# Altium PCB PCB1.PcbDoc
Units mm, origin at the board's own origin, x right, y up, seen from the top; angles counter-clockwise.
Board outline 37.85 x 26.67 mm, 2 copper layers (Top Layer, Bottom Layer); 17 components, 12 nets, 71 pads, 14 vias.
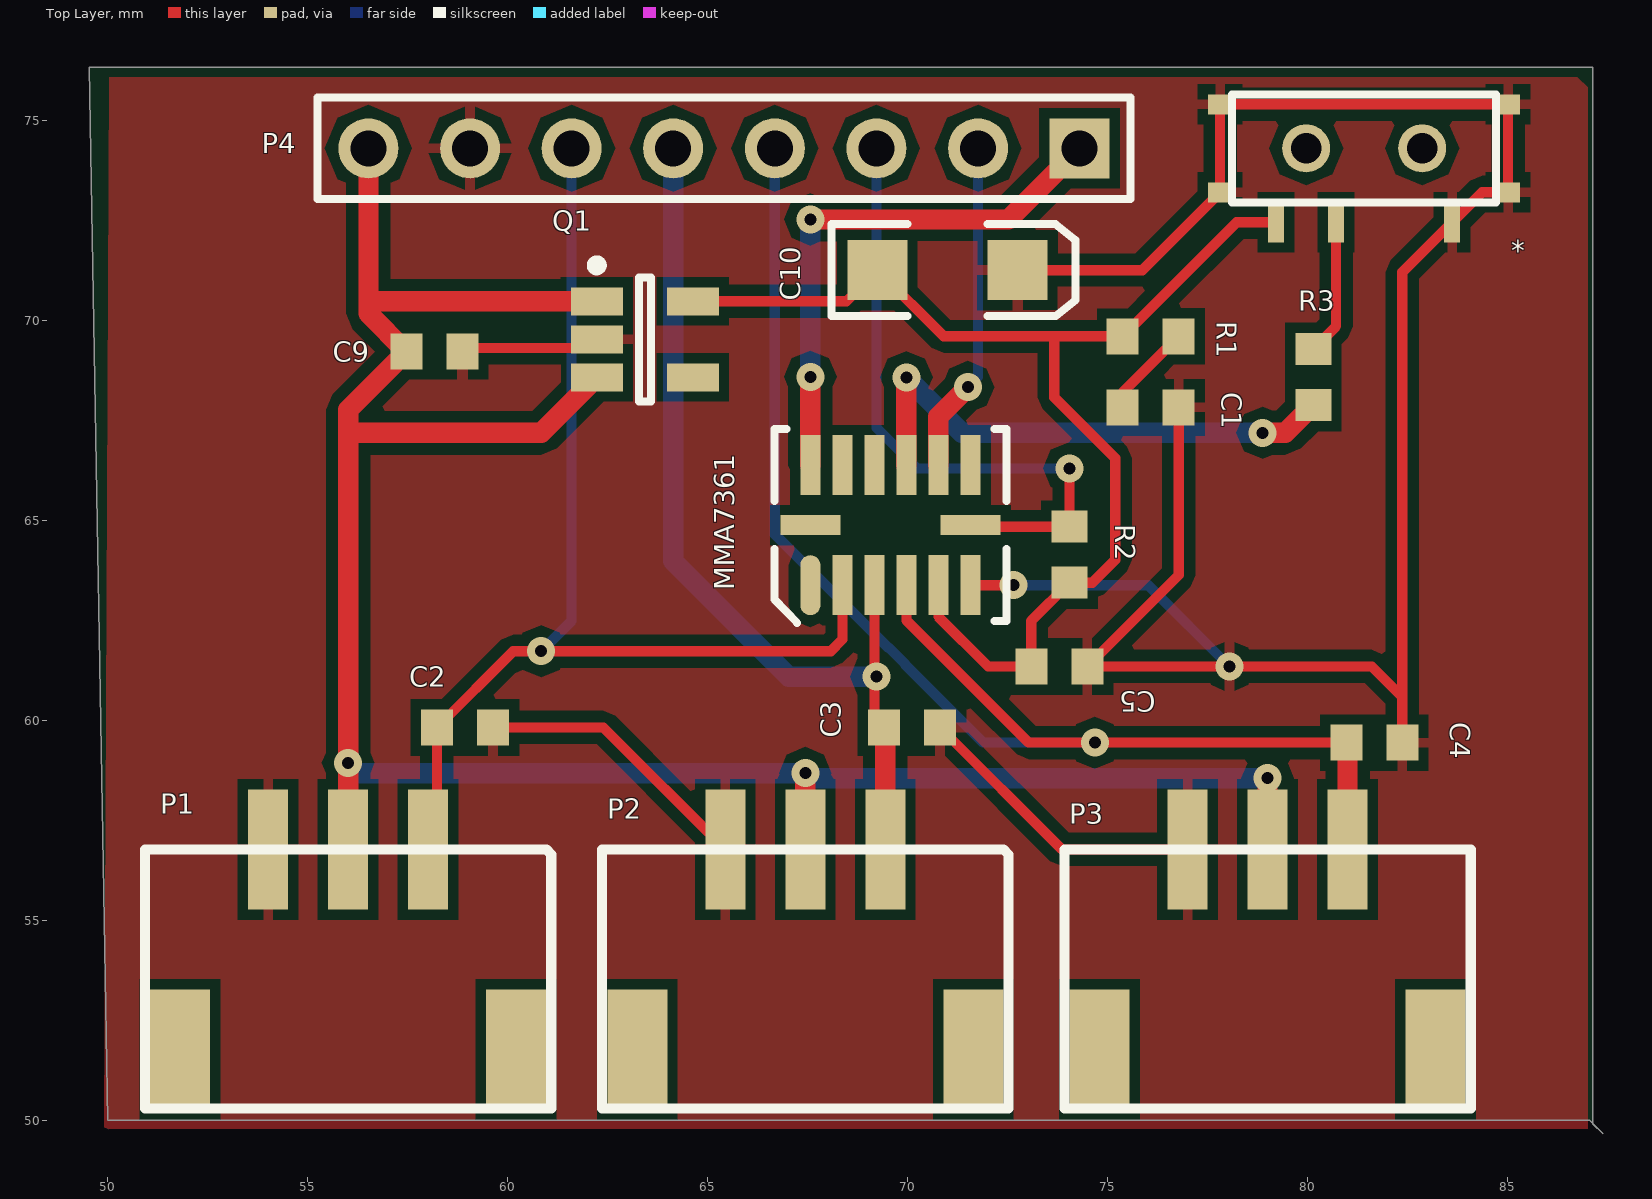
[diagram p0: Top Layer view]
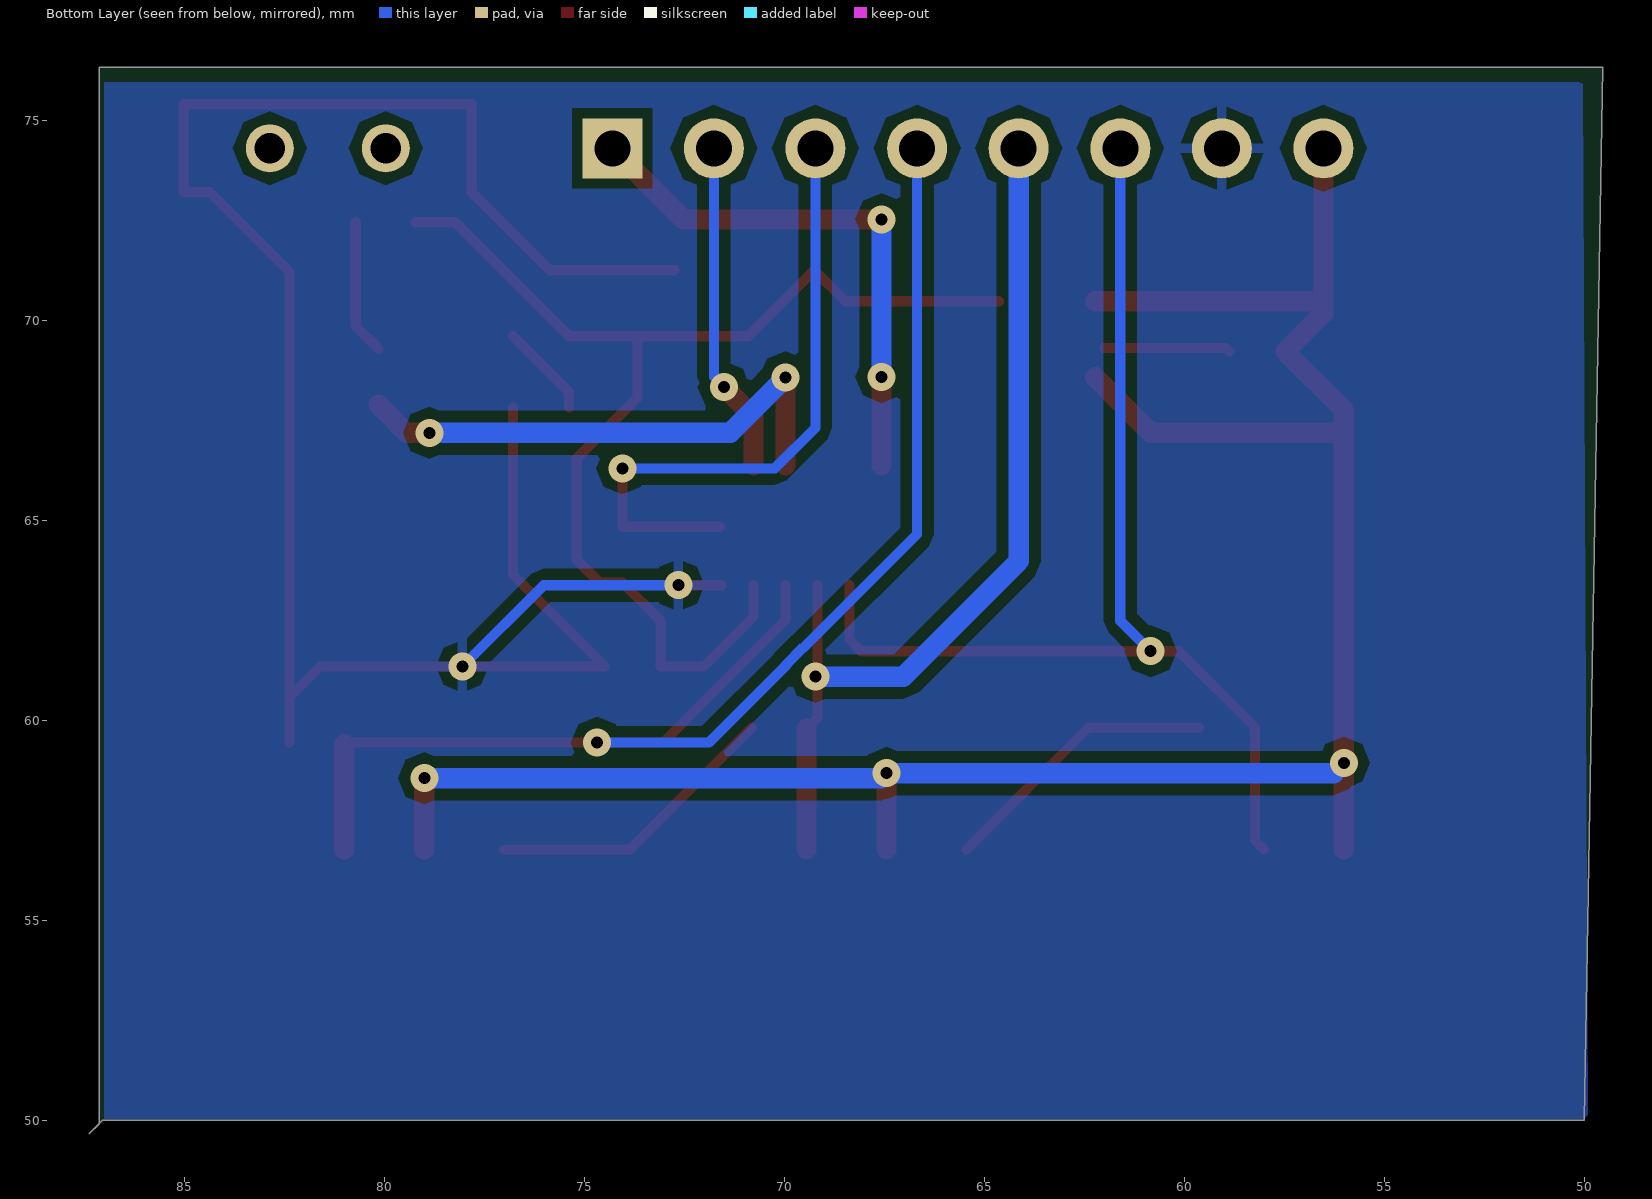
[diagram p1: Bottom Layer view, seen from below]

## Layer stack, top to bottom
Top Layer: signal copper 0.0356
Dielectric: dielectric 0.32, FR-4, Dk 4.8
Bottom Layer: signal copper 0.0356

## Board outline
49.53,76.327 87.122,76.327 87.122,49.911 87.376,49.657 87.033,50 50,50

## Design rules (kind name [scope] priority, off if disabled: settings)
Clearance [All] p1: gap=0.254
PolygonConnect [All] p1: connectstyle=Relief reliefconductorwidth=0.254 reliefentries=4 polygonreliefangle="90 Angle"
RoutingVias [All] p1: holewidth=0.711 width=1.27 viastyle="Through Hole" minholewidth=0.711 minwidth=1.27 maxholewidth=0.711 maxwidth=1.27
SilkscreenOverComponentPads [All] p1: minsilkscreentomaskgap=0.254
SolderMaskExpansion [All] p1: expansion=0.102
Width [All] p1: maxlimit=1.27 minlimit=0.254 preferedwidth=0.254
27 further rules are at their usual default settings.

## Classes and differential pairs
component class Sheet1: C1 C2 C3 C4 C5 C9 C10 P1 P2 P3 P4 Q1 R1 R2 R3

## Components (designator, comment, footprint, x,y, rotation, side; value= is the part's Value field where it differs from the comment)
* "Component_1" kaiguan 81.407,74.295 r0 top
C1 "Cap" 1608[0603] 76.073,67.818 r0 top
C2 "3.3n" 1608[0603] 58.928,59.817 r180 top
C3 "3.3n" 1608[0603] 70.104,59.817 r180 top
C4 "3.3n" 1608[0603] 81.661,59.436 r180 top
C5 "0.1u" 1608[0603] 73.787,61.341 r0 top
C9 "4.7u" 1608[0603] 58.166,69.215 r0 top
C10 "10u" 3.2X1.6X1.1 70.993,71.247 r0 top
MMA7361 "Component_1" MMA7361 67.564,63.373 r90 top (schematic designator *)
P1 "Header 3" sh-2.0 56.007,56.769 r0 top
P2 "Header 3" sh-2.0 67.437,56.769 r0 top
P3 "Header 3" sh-2.0 78.994,56.769 r0 top
P4 "Header 8" HDR1X8 74.295,74.295 r180 top
Q1 "3.3V  LDO" SOT235 62.23,71.374 r0 top (schematic designator *)
R1 "Res1" 1608[0603] 76.073,69.596 r0 top
R2 "Res2" 1608[0603] 74.041,64.135 r90 top
R3 "Res2" 1608[0603] 80.137,68.58 r270 top

## Footprints (in the part's own frame and the unit in brackets; to place one, negate y for a bottom-side part, rotate by r counter-clockwise, add the part's x,y. Pads: shape width x height; smd on the part's side, far side on the other; paste and mask are expansions set on the pad)
3.2X1.6X1.1 [mm] "SMT LED; 2 Flat Leads"
  rect 1.5x1.5 smd: 1(-1.75,0) 2(1.75,0)
  silkscreen extent -2.9,-1.15 3.2,1.15
1608[0603] [mm] "Chip Capacitor, Body 1.6x0.8mm, IPC High Density"
  rect 0.8x0.9 smd: 1(-0.7,0) 2(0.7,0)
  body extent -0.87,-0.48 0.87,0.48, height 1.3
HDR1X8 [mm] "Connector; Header; 8 Position"
  rect 1.5x1.5 hole 0.9: 1(0,0)
  round 1.5 hole 0.9: 2(2.54,0) 3(5.08,0) 4(7.62,0) 5(10.16,0) 6(12.7,0) 7(15.24,0) 8(17.78,0)
  silkscreen extent -1.27,-1.27 19.05,1.27
kaiguan [mm]
  round 1.2 hole 0.762: 0(-1.45,0) 1(1.45,0)
  rect 0.6x0.5 smd: 1(-3.6,1.1) 2(-3.6,-1.1) 3(3.6,1.1) 4(3.6,-1.1)
  rect 0.4x1 smd: 5(-2.2,-1.85) 6(-0.7,-1.85) 7(2.2,-1.85)
  silkscreen extent -3.3,-1.35 3.3,1.35
MMA7361 [mm]
  oval 1.5x0.5 smd: 1(0,0)
  rect 1.5x0.5 smd: 2(0,-0.8) 3(0,-1.6) 4(0,-2.4) 5(0,-3.2) 6(0,-4) 8(3,-4) 9(3,-3.2) 10(3,-2.4) 11(3,-1.6) 12(3,-0.8) 13(3,0)
  rect 0.5x1.5 smd: 7(1.5,-4) 14(1.5,0)
  silkscreen extent -0.94,-4.9 3.9,0.9
sh-2.0 [mm]
  rect 1x3 smd: 1(-2,0) 2(0,0) 3(2,0)
  rect 1.5x3 smd: GND(-4.2,-5) GND(4.2,-5)
  silkscreen extent -5.08,-6.48 5.08,0
SOT235 [mm]
  rect 1.3x0.7 smd: 1(-0.006,-0.904) 2(-0.006,-1.854) 3(-0.006,-2.804) 4(2.394,-2.804) 5(2.394,-0.904)
  silkscreen extent -0.13,-3.4 1.34,0.12, body extent 0.29,-3.4 2.09,-0.3, height 1.45

## Part data
C1: "Capacitor"
C2 C3 C4 C5 C9 C10: library part CAP-0.1UF, "SMD-CAP"
P1 P2: "Header, 3-Pin"
P4: "Header, 8-Pin"
R1: "Resistor"
R2 R3: library part Res1, "Resistor"

## Via types
v1: diameter 0.7, hole 0.3, Top Layer to Bottom Layer, 14 vias

## Nets (pads, with @x,y where several pads share a name; then routed paths per layer and width w, separated by ;. In a path a pad name is that pad's centre, name@x,y a point inside that pad or via, vN(x,y) a via of type N, cw(c..) or ccw(c..) an arc to the next point about the centre after c; other vN are vias at no path point)
0GD: MMA7361.9 P4.2 | length 8
  Top Layer w0.508: MMA7361.9 70.764,67.589 v1(71.501,68.326)
  Bottom Layer w0.254: 71.755,68.58 P4.2
G-s: *.6 R3.1 | length 3.4
  Top Layer w0.254: R3.1 80.707,69.85 *.6
GND: *.1@77.807,75.395 *.2 *.3 *.4 *.7 C1.2 C2.1 C3.1 C4.1 C5.2 C9.2 C10.2 MMA7361.6 P1.1 P2.1 P3.1 P4.7 Q1.2 | length 73.3
  Top Layer w0.254: C9.2 58.952,69.301 Q1.2@62.005,69.301 ; C2.1 62.389,59.817 P2.1 ; C3.1 73.852,56.769 P3.1 ; MMA7361.6 v1(72.644,63.373) ; C10.2 75.859,71.247 *.2 77.807,75.395 *.3 *.4 84.357,73.195 *.7 82.361,71.199 82.361,60.579 ; C1.2 76.773,63.627 C5.2 v1(78.043,61.341) 81.599,61.341 82.361,60.579 ; C4.1 82.361,60.579
  Bottom Layer w0.254: v1(72.644,63.373) 76.011,63.373 v1(78.043,61.341)
Net*_10: MMA7361.10 R3.2 | length 13.2
  Top Layer w0.508: MMA7361.10 v1(69.964,68.567) ; v1(78.867,67.183) 79.44,67.183 R3.2
  Bottom Layer w0.508: v1(69.964,68.567) 71.348,67.183 v1(78.867,67.183)
NetC1_1: C1.1 R1.2 | length 2.4
  Top Layer w0.254: C1.1 75.373,68.196 R1.2
SLP: MMA7361.7 P4.3 R2.2 | length 16.1
  Top Layer w0.254: MMA7361.7@71.602,64.835 R2.2 v1(74.041,66.294)
  Bottom Layer w0.254: P4.3 69.215,67.31 70.231,66.294 v1(74.041,66.294)
ST: MMA7361.13 P4.1 | length 13.6
  Top Layer w0.508: MMA7361.13 v1(67.564,68.58) ; v1(67.564,72.517) 72.517,72.517 P4.1
  Bottom Layer w0.508: v1(67.564,68.58) v1(67.564,72.517)
VCC_3.3V: *.5 C5.1 C10.1 MMA7361.5 Q1.5 R1.1 R2.1 | length 30.5
  Top Layer w0.254: Q1.5 68.466,70.47 C10.1 70.894,69.596 73.66,69.596 ; MMA7361.5 70.764,62.586 72.009,61.341 C5.1 73.087,62.481 R2.1 74.611,63.435 75.184,64.008 75.184,66.548 73.66,68.072 73.66,69.596 ; *.5 78.222,72.445 R1.1 73.66,69.596
VCC_5V: C9.1 P1.2 P2.2 P3.2 P4.8 Q1.1 Q1.3 | length 57.2
  Top Layer w0.508: P1.2 v1(56.007,58.928) 56.007,67.183 ; P4.8 56.515,70.166 C9.1 56.007,67.756 56.007,67.183 ; 56.657,70.47 Q1.1 ; Q1.3 60.837,67.183 56.007,67.183 ; P2.2 v1(67.437,58.674) ; P3.2 v1(78.994,58.547)
  Bottom Layer w0.508: 56.261,58.674 v1(67.437,58.674) ; v1@67.564,58.547 v1(78.994,58.547)
X: C2.2 MMA7361.2 P1.3 P4.6 | length 28.4
  Top Layer w0.254: P1.3 58.228,56.99 C2.2 60.133,61.722 v1(60.833,61.722) 68.072,61.722 68.364,62.014 MMA7361.2
  Bottom Layer w0.254: v1(60.833,61.722) 61.595,62.484 P4.6
Y: C3.2 MMA7361.3 P2.3 P4.5 | length 23.3
  Top Layer w0.254: MMA7361.3 69.164,60.057 C3.2
  Top Layer w0.508: P2.3 C3.2@69.437,59.784
  Bottom Layer w0.508: P4.5 64.135,63.976 67.024,61.087 v1(69.215,61.087)
Z: C4.2 MMA7361.4 P3.3 P4.4 | length 35.6
  Top Layer w0.254: MMA7361.4 69.964,62.497 73.025,59.436 C4.2
  Top Layer w0.508: P3.3 C4.2@80.994,59.403
  Bottom Layer w0.254: P4.4 66.675,64.643 69.5,61.818 69.518,61.818 69.946,61.39 69.946,61.372 71.882,59.436 v1(74.676,59.436)
pads on no net: *.0 *.1@82.857,74.295 MMA7361.1 MMA7361.8 MMA7361.11 MMA7361.12 MMA7361.14 P1.GND P2.GND P3.GND Q1.4

## Polygon pours and split planes (outlines as drawn)
GND on Bottom Layer "Top Layer-No Net" (solid, pour order 2): 50.038,76.073 50.165,75.946 86.995,75.946 86.995,50.038 49.911,50.038
GND on Top Layer "Top Layer-No Net" (solid, pour order 4): 50.038,76.073 86.741,76.073 86.995,75.819 86.995,49.784 50.038,49.784 49.911,49.657

## Silkscreen, mask and mechanical layers (free items; w line width, h text height)
Mechanical 1:
  lines w0.254: 50,50 50,76 87,76 87,50 50,50